# Allegro board touchcontroller_rev1.brd
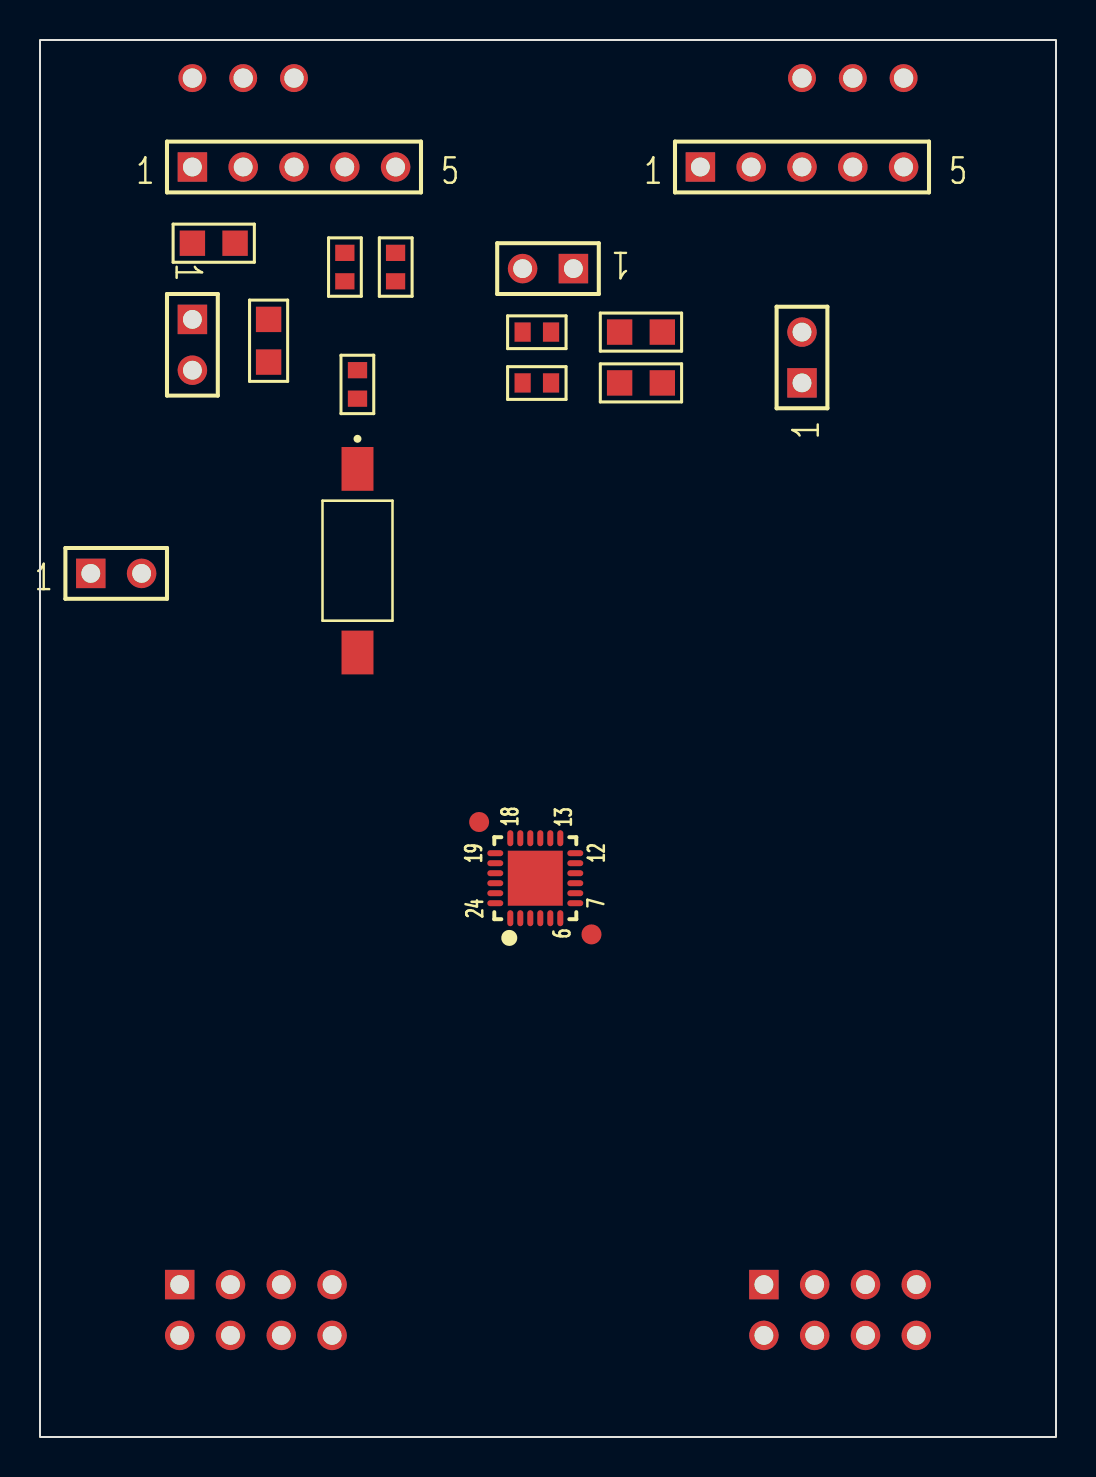
[diagram p0: board, top side]
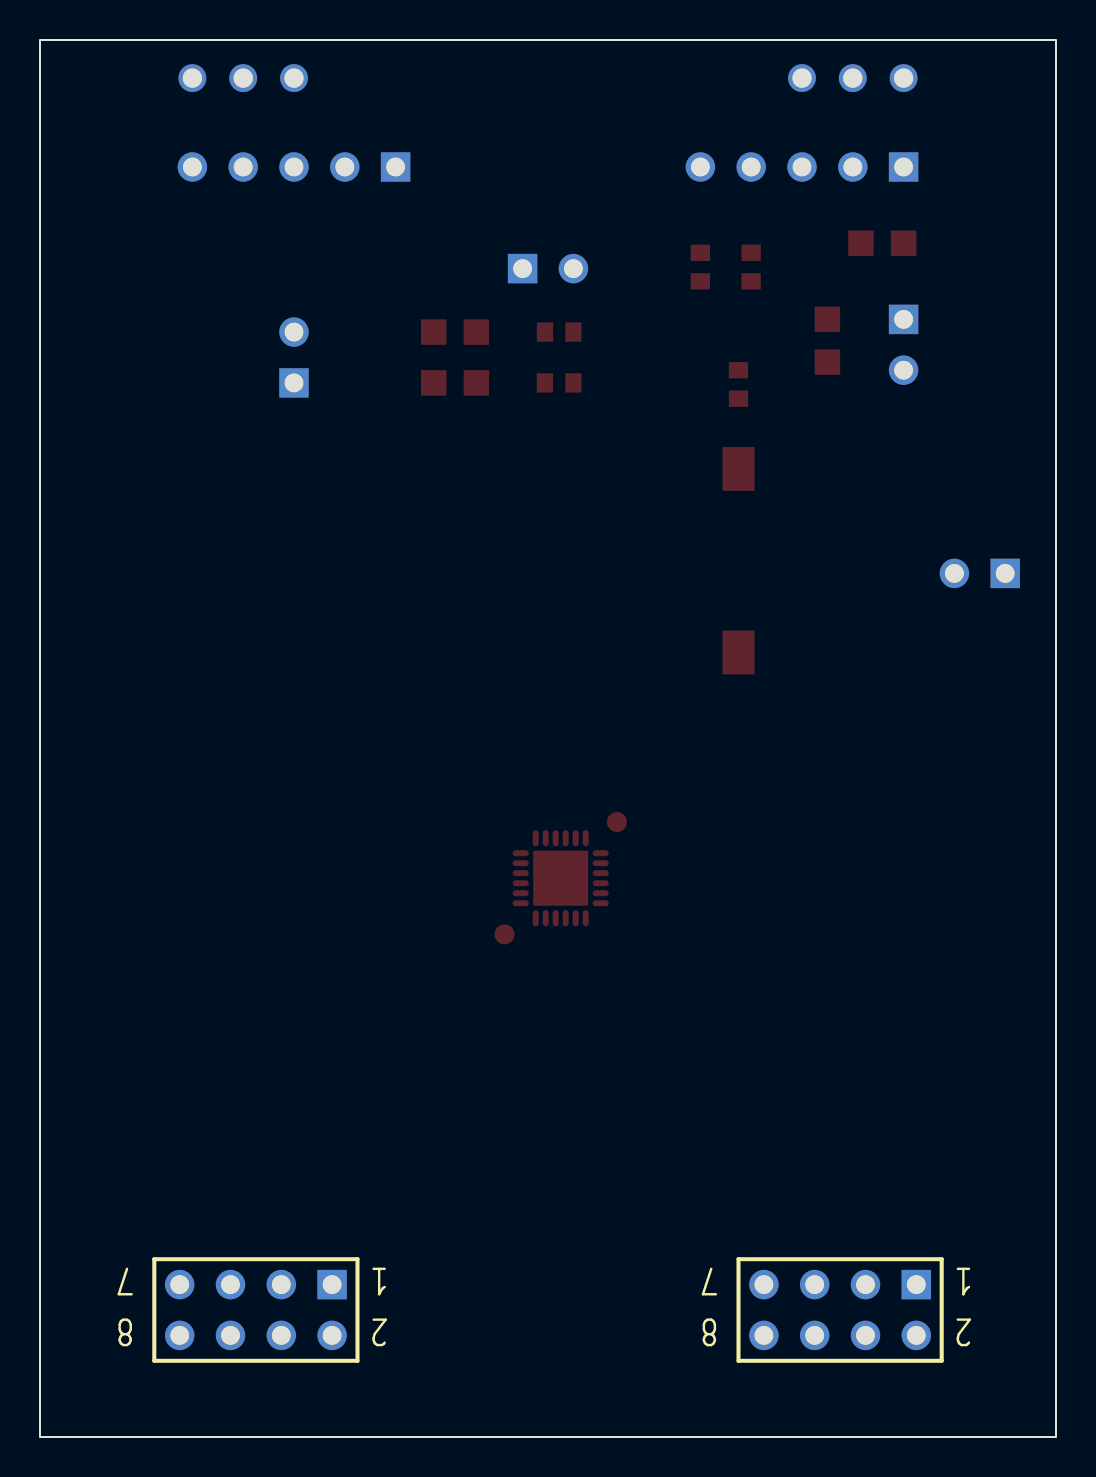
[diagram p1: board, bottom side, seen from below]

Outline 50.8 x 69.85 mm; copper layers: TOP, BOTTOM. Coordinates in mm from the lower left corner of the outline.
Outline path: rectangle 0,0 50.8,69.85

## Design rules (mm)
constraint set DEFAULT: min track width 0.127

## Placement (name value [footprint] x y rotation side)
C1  1 uF  [SMC0805]  7.62 59.69 0 top
D1  LED  [SMC0805]  31.11 52.7 180 top
D2  LED  [SMC0805]  31.11 55.24 180 top
J1  Measure  [BLKCON100VHTM1SQW1002]  7.62 55.88 270 top
J2  MiniProg3  [BLKCON100VHTM1SQW1005]  7.62 63.5 0 top
J3  HEADER 2/SM  [BLKCON100VHTM1SQW1002]  38.1 52.7 90 top
J4  Host/Tune  [BLKCON100VHTM1SQW1005]  33.02 63.5 0 top
J5  HEADER 2/SM  [BLKCON100VHTM1SQW1002]  26.67 58.42 180 top
J6  HEADER 2/SM  [BLKCON100VHTM1SQW1002]  2.54 43.18 0 top
J7  CON8A  [BLKCON100VHTM2OEW2008]  36.2 7.62 0 bottom
J8  CON8A  [BLKCON100VHTM2OEW2008]  6.99 7.62 0 bottom
R1  0  [SMR0805]  11.43 55.88 270 top
R2  4.7k  [SMR0603]  15.88 53.34 270 top
R3  4.7k  [SMR0603]  15.24 57.78 90 top
R4  4.7k  [SMR0603]  17.78 57.78 90 top
R7  2.7k  [SMR0603]  24.13 52.7 0 top
R14  2.7k  [SMR0603]  24.13 55.24 0 top
SW1  RESET  [TE_FSMSM]  15.88 43.81 270 top
TP1  Vddd  [TP]  7.62 67.94 0 top
TP2  XRES  [TP]  12.7 67.94 0 top
TP3  INT  [TP]  38.1 67.94 0 top
TP4  SDA  [TP]  40.64 67.94 0 top
TP5  SCL  [TP]  43.18 67.94 0 top
TP6  GND  [TP]  10.16 67.94 0 top
U1  CY8C4025LQI-S411  [QFN50P400X400X60-25N]  24.77 27.94 90 top

## Library data of the parts
C1 = CAP NP
D1 D2 = LED
J1 J3 J5 J6 = HEADER 2/SM
J2 J4 = CON5
J7 J8 = CON8A
R1-R4 R7 R14 = RESISTOR
SW1 = SW PUSHBUTTON
TP1-TP6 = T POINT R
U1 = CY8C40QFN24_050P_djjw

## Footprints (pads in the part's own frame, mm; a bottom-side part is the same pattern mirrored in y, then rotated)
BLKCON100VHTM1SQW1002
  rect 1.473x1.473 hole 0.94: 1(0,0)
  round 1.473 hole 0.94: 2(2.54,0)
BLKCON100VHTM1SQW1005
  rect 1.473x1.473 hole 0.94: 1(0,0)
  round 1.473 hole 0.94: 2(2.54,0) 3(5.08,0) 4(7.62,0) 5(10.16,0)
BLKCON100VHTM2OEW2008
  rect 1.473x1.473 hole 0.94: 1(0,0)
  round 1.473 hole 0.94: 2(0,2.54) 3(2.54,0) 4(2.54,2.54) 5(5.08,0) 6(5.08,2.54) 7(7.62,0) 8(7.62,2.54)
QFN50P400X400X60-25N
  round 1 smd: (-2.809,-2.809) (2.809,2.809)
  oval 0.8x0.3 smd: 1(-2,1.25) 2(-2,0.75) 3(-2,0.25) 4(-2,-0.25) 5(-2,-0.75) 6(-2,-1.25) 13(2,-1.25) 14(2,-0.75) 15(2,-0.25) 16(2,0.25) 17(2,0.75) 18(2,1.25)
  oval 0.3x0.8 smd: 7(-1.25,-2) 8(-0.75,-2) 9(-0.25,-2) 10(0.25,-2) 11(0.75,-2) 12(1.25,-2) 19(1.25,2) 20(0.75,2) 21(0.25,2) 22(-0.25,2) 23(-0.75,2) 24(-1.25,2)
  rect 2.75x2.75 smd: 25(0,0)
SMC0805
  rect 1.27x1.27 smd: 1(0,0) 2(2.134,0)
SMR0603
  rect 0.813x0.965 smd: 1(0,0) 2(1.422,0)
SMR0805
  rect 1.27x1.27 smd: 1(0,0) 2(2.134,0)
TE_FSMSM
  rect 2.19x1.6 smd: 1(-4.59,0) 2(4.59,0)
TP
  round 1.397 hole 0.965: 1(0,0)

## Nets
GND_SIGNAL: C1.2 J2.2 J4.2 J6.1 J6.2 J8.5 SW1.2 TP6.1(TP) U1.20 U1.22 U1.25
VDDD: J1.2 R1.2 R2.1 R3.1 R4.1 R7.1 R14.1 TP1.1(TP) U1.21
BTN0: J7.7
BTN1: J8.7
BTN2: J8.2
BTN3: J7.1
BTN4: J8.8
BTN5: J8.3
BTN6: J7.2
BTN7: J8.6
BTN8: J7.8
BTN9: J7.4
BTNC: J8.4
BTNE: J7.6
PROX: J8.1
SCL: J4.5 TP5.1(TP)
SDA: J4.4 TP4.1(TP)
SHLD: J7.5
SWDCLK/INT: J2.4 J3.2 J4.3 R3.2 TP3.1(TP)
SWDIO: J2.5 J5.2 R4.2
XRES: J2.3 R2.2 SW1.1 TP2.1(TP)
N03409: C1.1 J1.1 J2.1 J4.1 R1.1
N08132: D1.1(CATHODE) J3.1
N08138: D1.2 R7.2
N38338: U1.19
N40277: U1.11
N40592: U1.10
N40596: U1.9
N44927: U1.8
N44931: U1.7
N45172: U1.12
N45764: U1.18(X\R\E\S\)
N46718: U1.24
N46720: U1.23
N370650: U1.1
N370651: U1.2
N370652: U1.3
N370653: U1.4
N370654: U1.5
N370655: U1.6
N474020: D2.1(CATHODE) J5.1
N476451: D2.2 R14.2
N3706512: U1.13
N3706513: U1.14
N3706514: U1.15
N3706515: U1.16
N3706516: U1.17

Pads without a net: J7 3
